# Altium PCB RockRTK.PcbDoc (part 7 of 8)
Units mm, origin at the board's own origin, x right, y up, seen from the top; angles counter-clockwise.
Board outline 128 x 72 mm, 6 copper layers (Top Layer, MidLayer1GND, MidLayer2SIG, MidLayer3PWR, MidLayer4GND, Bottom Layer), stack 1.538 mm thick; 400 components, 307 nets, 1795 pads, 1243 vias.
Unrouted connection lines stored in the file: 522.
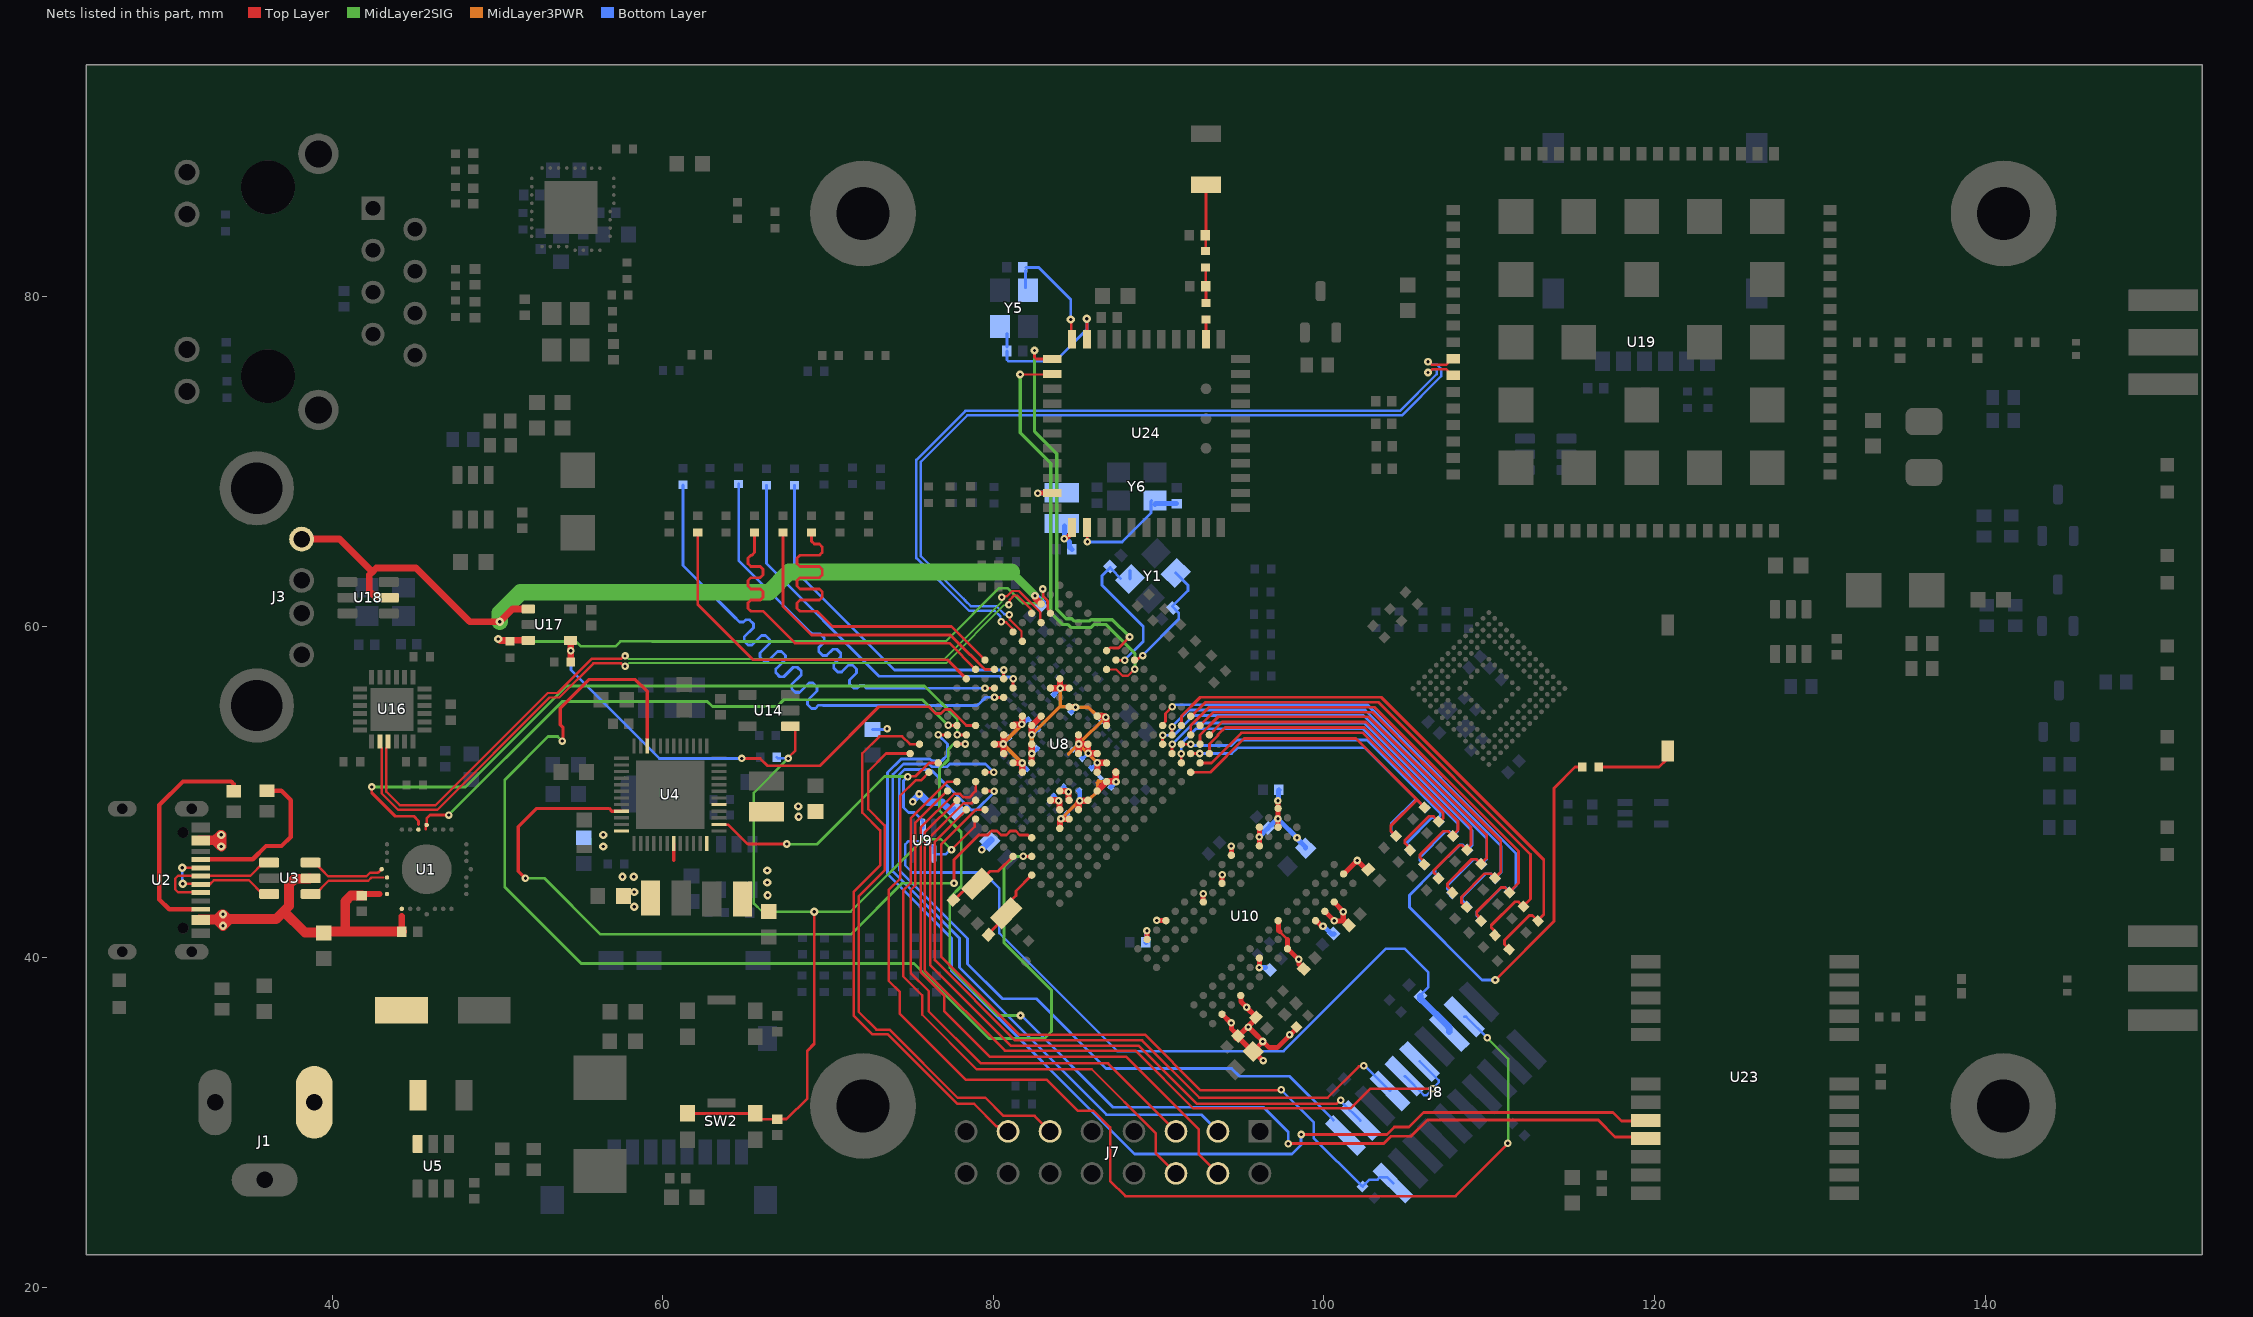
[diagram p10: the nets of this part, all layers, seen from the top]

## Via types
v1: diameter 0.5, hole 0.2, Top Layer to Bottom Layer, tented both sides, 532 vias
v2: diameter 0.457, hole 0.203, Top Layer to Bottom Layer, tented both sides, 414 vias
v3: diameter 0.5, hole 0.2, Top Layer to Bottom Layer, 233 vias
v4: diameter 0.7, hole 0.3, Top Layer to Bottom Layer, 32 vias
v5: diameter 0.457, hole 0.2, Top Layer to Bottom Layer, tented both sides, 30 vias
v6: diameter 0.7, hole 0.3, Top Layer to Bottom Layer, tented both sides, 2 vias

## Nets (pads, with @x,y where several pads share a name; then routed paths per layer and width w, separated by ;. In a path a pad name is that pad's centre, name@x,y a point inside that pad or via, vN(x,y) a via of type N, cw(c..) or ccw(c..) an arc to the next point about the centre after c; other vN are vias at no path point) (continued)
SOC_MII_RXER: R158.2 U8.J15 | length 37.3
  Top Layer w0.169: v2@80.08,55.72 U8.J15@80.646,55.72
  Bottom Layer w0.169: R158.2@61.225,68.575 61.225,63.7 64.27,60.655 64.649,60.276 64.888,60.276 65.024,60.412 65.264,60.412 65.503,60.172 65.503,59.933 64.933,59.362 64.933,59.123 65.172,58.883 65.412,58.883 65.987,59.459 66.227,59.459 66.466,59.22 66.466,58.98 65.89,58.404 65.89,58.165 66.13,57.926 66.369,57.926 66.945,58.501 67.185,58.501 67.424,58.262 67.424,58.023 66.848,57.447 66.848,57.207 67.088,56.968 67.327,56.968 67.903,57.544 68.143,57.544 68.382,57.304 68.382,57.065 67.806,56.489 67.806,56.249 68.046,56.01 68.285,56.01 68.861,56.586 69.1,56.586 69.34,56.346 69.34,56.107 68.764,55.531 68.764,55.292 69.003,55.052 69.243,55.052 69.438,55.247 69.678,55.247 69.7,55.225 69.775,55.225 79.025,55.225 79.085,55.285 79.107,55.285 79.548,55.725 v2(80.075,55.725)
SOC_MII_TXCLK: R152.2 U8.K18 | length 24.3
  Top Layer w0.169: R152.2@69.007,65.7 69.007,65.347 69.007,65.163 69.177,64.994 69.482,64.994 69.652,64.824 69.652,64.486 69.482,64.316 68.305,64.316 68.136,64.147 68.136,63.809 68.305,63.639 69.482,63.639 69.652,63.47 69.652,63.131 69.482,62.962 68.305,62.962 68.136,62.793 68.136,62.454 68.305,62.285 69.482,62.285 69.652,62.115 69.652,61.777 69.482,61.607 68.305,61.607 68.136,61.438 68.136,61.099 68.305,60.93 69.345,60.93 69.43,60.845 70.275,60 77.479,60 U8.K18@79.501,57.978
SOC_MII_TXD0: R148.2 U8.K17 | length 18.8
  Top Layer w0.169: R148.2@67.286,65.7 67.286,64.65 67.286,61.863 67.286,61.214 69,59.5 77.4,59.5 78.6,58.3 78.615,58.3 79.503,57.412 U8.K17@80.066,57.412
SOC_MII_TXD1: R149.2 U8.K16 | length 20.8
  Top Layer w0.169: v2(80.625,57.375) 80.628,57.372 80.628,56.85 U8.K16@80.632,56.847
  Bottom Layer w0.169: R149.2@67.975,68.55 67.975,63.425 74.025,57.375 v2(80.625,57.375)
SOC_MII_TXD2: R150.2 U8.K15 | length 23.1
  Top Layer w0.169: U8.K15@81.2,56.259 81.199,56.26 81.199,56.849 v2(81.2,56.85)
  Bottom Layer w0.169: R150.2@66.275,68.55 66.275,63.825 73.1,57 80.377,57 80.443,56.935 80.807,56.935 80.817,56.944 81.028,56.944 81.122,56.85 v2(81.2,56.85)
SOC_MII_TXD3: R151.2 U8.J18 | length 22.9
  Top Layer w0.169: R151.2@65.564,65.7 65.564,65.036 65.564,64.486 65.395,64.317 65.335,64.317 65.166,64.148 65.166,63.809 65.335,63.64 65.905,63.64 66.074,63.47 66.074,63.132 65.905,62.962 65.335,62.962 65.166,62.793 65.166,62.454 65.335,62.285 65.905,62.285 66.074,62.116 66.074,61.777 65.905,61.608 65.335,61.608 65.166,61.438 65.166,61.1 65.335,60.93 66.07,60.93 66.154,60.846 68,59 77.347,59 U8.J18@78.935,57.412
SOC_MII_TXEN: R153.2 U8.J16 | length 27.3
  Top Layer w0.169: v2@79.505,56.27 U8.J16@80.071,56.27
  Bottom Layer w0.169: R153.2@64.6,68.625 64.6,64 68.799,59.801 69.055,59.545 69.294,59.545 69.534,59.545 69.773,59.306 69.773,59.066 69.444,58.738 69.444,58.498 69.684,58.259 69.923,58.259 70.297,58.632 70.536,58.632 70.776,58.393 70.776,58.153 70.352,57.729 70.352,57.49 70.591,57.251 70.831,57.251 71.255,57.675 71.494,57.675 71.734,57.435 71.734,57.196 71.31,56.772 71.31,56.532 71.549,56.293 71.789,56.293 71.928,56.432 72.168,56.432 72.228,56.372 72.325,56.275 v2(79.5,56.275)
SOC_PMIC_PWR_EN: U4.9 U8.C6 | length 45.9
  Top Layer w0.169: v2(77.625,44.475) 77.625,45.9 79.122,47.397 79.666,47.397 79.897,47.629 80.234,47.629 80.466,47.397 80.799,47.397 81.03,47.629 81.367,47.629 81.598,47.397 81.928,47.397 81.931,47.4 82.089,47.4 82.259,47.23 U8.C6@82.329,47.23
  Top Layer w0.203: v2(51.7,44.775) 51.275,45.2 51.275,47.9 52.375,49 56.759,49 56.925,48.834 U4.9@57.52,48.834
  MidLayer2SIG w0.169: v2(51.7,44.775) 52.85,44.775 56.24,41.385 71.385,41.385 74.475,44.475 v2(77.625,44.475)
SOC_PWR_ONRSTN: U4.26 U8.B15 U9.2 | length 19.7
  Top Layer w0.169: U4.26@63.42,48.034 63.435,48.019 63.956,48.019 65.125,46.85 v2(67.5,46.85) ; v2@74.925,50.95 75.3,50.95 76.106,51.756 U8.B15@76.672,51.756
  MidLayer2SIG w0.169: v2(67.5,46.85) 67.515,46.835 69.335,46.835 73.425,50.925 v2@74.9,50.925
  Bottom Layer w0.169: v2@74.85,50.95 74.575,50.675 74.575,49.05 74.875,48.75 75.234,48.75 75.75,48.234 U9.2@75.75,47.82
  other v2: 74.825,50.925
SOC_RMII_REFCLK: R159.2 U8.H18 | length 22.5
  Top Layer w0.169: R159.2@62.121,65.7 62.121,61.329 65.45,58 70.95,58 71.025,58 75.972,58 76.688,58 77.216,58 U8.H18@78.369,56.847
SOC_RTC_PWRONRSTN: U4.46 U8.B5 | length 73
  Top Layer w0.169: v2@81.826,46.099 U8.B5@82.329,46.099
  Top Layer w0.203: v5(53.925,53.075) 53.974,53.124 53.974,53.599 53.975,53.6 53.975,53.884 53.8,54.059 53.8,55.075 55.525,56.8 58.35,56.8 59.07,56.08 U4.46@59.07,52.784
  MidLayer2SIG w0.169: v5(53.925,53.075) 53.65,53.35 53.075,53.35 50.45,50.725 50.45,44.25 55.075,39.625 75.2,39.625 79.75,35.075 83.1,35.075 83.525,35.5 83.525,38 80.65,40.875 80.65,45.45 81.3,46.1 v2(81.825,46.1)
SOC_RTC_XTALIN: C89.2 U8.A6 Y2.1 | length 4
  Top Layer w0.169: C89.2@77.675,43.5 78.614,44.439 Y2.1@79.018,44.439 ; Y2.1@79.425,44.825 79.8,45.2 80.299,45.2 U8.A6@81.198,46.099
SOC_RTC_XTALOUT: C88.2 U8.A4 Y2.2 | length 4.6
  Top Layer w0.169: C88.2@79.725,41.425 80.786,42.486 80.786,43.136 81.375,43.725 81.375,44.013 U8.A4@82.329,44.967
SOC_SPI1_CS0: J7.04 U8.C12 | length 38.4
  Top Layer w0.152: U8.C12@78.935,50.624 78.935,50.045 78.559,49.668 78.208,49.668 77.993,49.883 77.642,49.883 75.609,47.85 75.609,39.1 77.047,37.662 77.047,36.728 79.8,33.975 88.05,33.975 92.425,29.6 92.425,28.095 J7.04@93.595,26.925 ; J7.04@93.6,26.725 J7.04@93.6,26.92
SOC_SPI1_D0: J7.06 U8.B13 | length 36.3
  Top Layer w0.152: U8.B13@77.804,50.624 77.224,50.624 75,48.4 75,44.475 74.55,44.025 74.55,38.85 75.703,37.697 75.703,36.522 79,33.225 85.957,33.225 89.845,29.338 89.845,28.135 J7.06@91.055,26.925
SOC_SPI1_D1: J7.03 U8.D12 | length 40.3
  Top Layer w0.169: U8.D12@79.495,51.17 79.52,51.195 80.02,51.195 v2(80.025,51.2)
  Bottom Layer w0.169: v2(80.025,51.2) 79.535,51.69 77.365,51.69 77.2,51.525 76.285,51.525 76.12,51.69 74.565,51.69 73.925,51.05 73.925,45.175 77.95,41.15 77.95,39.375 86.85,30.475 92.585,30.475 J7.03@93.595,29.465
SOC_SPI1_SCLK: J7.05 U8.A13 | length 32.7
  Top Layer w0.152: U8.A13@77.238,50.059 77.209,50.059 75.275,48.125 75.275,44.325 75,44.05 75,39.05 76.097,37.953 76.097,36.728 79.25,33.575 86.945,33.575 90.875,29.645 J7.05@90.875,29.425
SOC_SYS_RESET: C90.1 C164.1 J8.15 R14.1 SW2.1 SW2.2 U8.A10 U9.4 U14.1 | length 100
  Top Layer w0.152: v2(67.6,52.025) 67.6,52.082 68.025,52.507 68.025,53.751 67.801,53.975 U14.1@67.725,53.975 ; v2(77.475,46.5) 78.883,47.908 78.883,48.31 U8.A10@78.935,48.362
  Top Layer w0.169: SW2.1@61.575,30.55 SW2.2@65.6,30.55 65.95,30.2 C90.1@66.85,30.2 ; C90.1@66.925,30.205 67.501,30.205 68.753,31.458 68.753,34.343 69.175,34.765 v1(69.175,42.75)
  MidLayer2SIG w0.152: v2@67.55,51.925 67.5,51.925 65.525,49.95 65.525,43.25 66.025,42.75 71.375,42.75 75.775,47.15 76.825,47.15 v2(77.475,46.5)
  Bottom Layer w0.152: R14.1@66.9,52.1 66.975,52.025 v2(67.6,52.025) ; U9.4@76.4,46.28 76.4,46.644 76.315,46.729 76.204,46.729 75.906,47.027 74.877,47.027 74.675,46.825 74.675,45.55 75.1,45.125 79.4,45.125 80.375,44.15 80.375,41.45 87.5,34.325 97.561,34.325 103.736,40.5 104.9,40.5 106.325,39.075 106.325,38.2 C164.1@105.85,37.725 ; U9.4@76.45,46.225 77.118,46.225 77.393,46.5 v2(77.475,46.5) ; J8.15@106.752,36.523 107.479,35.641 J8.15@107.595,35.501
  Bottom Layer w0.406: C164.1@105.839,37.636 105.829,37.625 105.829,37.503 107.595,35.737 J8.15@107.595,35.501
SOC_TCK: J8.09 J8.11 U8.A12 | length 50.4
  Top Layer w0.152: U8.A12@77.804,49.493 75.85,47.539 75.85,39.2 80.7,34.35 88.6,34.35 92.1,30.85 101.625,30.85 102.825,32.05 v2(106.575,32.05)
  Bottom Layer w0.152: J8.09@104.901,32.807 106.058,31.65 106.221,31.65 106.575,32.004 v2(106.575,32.05) 106.95,32.425 106.95,32.554 J8.11@105.799,33.705
SOC_TDI: J8.03 U8.B11 | length 41.4
  Top Layer w0.152: U8.B11@78.935,49.493 78.865,49.493 78.697,49.325 78.215,49.325 76.175,47.285 76.175,39.525 81.05,34.65 88.8,34.65 92.3,31.15 100.783,31.15 100.983,31.35 v2(101.025,31.35)
  Bottom Layer w0.152: v2@101.096,31.224 J8.03@102.207,30.113
SOC_TDO: J8.07 U8.A11 | length 42.2
  Top Layer w0.152: U8.A11@78.369,48.927 78.369,48.894 76.475,47 76.475,39.825 81.325,34.975 89,34.975 92.475,31.5 100.225,31.5 102.117,33.392 102.392,33.392 v2(102.425,33.425)
  Bottom Layer w0.152: v2@102.525,33.35 102.531,33.356 102.555,33.356 J8.07@104.003,31.909
SOC_TMS: J8.01 U8.C11 | length 47.1
  Top Layer w0.169: U8.C11@79.505,50.055 v2@80.045,50.055
  Bottom Layer w0.169: v2(80.05,50.05) 80.05,49.975 78.975,48.9 78.675,48.9 76.308,51.267 76.178,51.267 76.079,51.365 74.643,51.365 74.325,51.048 74.325,50.79 74.317,50.782 74.317,48.943 74.325,48.935 74.325,45.25 78.45,41.125 78.45,39.6 80.56,37.49 81.307,37.49 82.61,37.49 86.825,33.275 94.425,33.275 94.9,32.8 97.925,32.8 J8.01@100.575,30.15
SOC_TRSTN: J8.02 R168.2 U8.B10 | length 44.3
  Top Layer w0.152: U8.B10@79.501,48.927 78.949,48.927 76.85,46.828 76.85,40.05 81.6,35.3 89.2,35.3 92.55,31.95 97.4,31.95 v2(97.425,31.975)
  Bottom Layer w0.152: v2(97.425,31.975) 99.375,30.025 99.375,29.075 R168.2@102.271,26.179 ; R168.2@102.346,26.129 102.768,26.55 103.253,26.55 103.406,26.702 103.821,26.702 J8.02@104.187,26.337
SOC_UART1_RX: U8.D16 U23.20 | length 67.8
  Top Layer w0.169: v2(76.675,53.45) 76.676,53.451 77.189,53.451 U8.D16@77.195,53.445 ; v2(98.625,29.275) 103.812,29.275 104.264,29.726 105.151,29.726 106.025,30.6 117.5,30.6 118,30.1 119.35,30.1 U23.20@119.375,30.125
  Bottom Layer w0.169: v2(76.675,53.45) 77.225,52.9 77.225,52.225 76.885,51.885 76.29,51.885 76.175,52 74.435,52 73.6,51.165 73.6,45.025 77.475,41.15 77.475,39.179 88.554,28.1 98.075,28.1 98.625,28.65 v2(98.625,29.275)
SOC_UART1_TX: U8.D15 U23.21 | length 63.8
  Top Layer w0.169: U8.D15@77.755,52.905 v2@78.295,52.905 ; v2(97.85,28.725) 103.627,28.725 104.069,29.167 105.281,29.167 106.264,30.15 116.6,30.15 117.625,29.125 119.125,29.125 U23.21@119.3,28.95
  MidLayer2SIG w0.169: v2(78.3,52.9) 77.6,52.9 77.275,52.575 77.275,51.95 76.75,51.425 76.75,48.875 78.065,47.56 78.065,44.293 77.375,43.602 77.375,39.375 80.275,36.475 v2(81.65,36.475)
  Bottom Layer w0.169: v2(81.65,36.475) 81.7,36.475 87.25,30.925 96.35,30.925 97.85,29.425 v2(97.85,28.725)
SOC_UART2_RX: J7.11 U8.A17 | length 33.2
  Top Layer w0.152: U8.A17@74.975,52.321 74.971,52.325 73.525,52.325 72.45,51.25 72.45,48.95 73.425,47.975 73.425,45.25 71.85,43.675 71.85,36.7 72.925,35.625 73.725,35.625 77.85,31.5 79.525,31.5 80.625,30.4 82.5,30.4 J7.11@83.435,29.465
SOC_UART2_TX: J7.13 U8.B17 | length 33.3
  Top Layer w0.152: U8.B17@75.541,52.887 74.961,52.887 74.486,53.362 73.112,53.362 72.075,52.325 72.075,48.75 73.15,47.675 73.15,45.55 71.55,43.95 71.55,37.466 71.553,37.463 71.553,37.087 71.55,37.084 71.55,36.475 72.675,35.35 73.6,35.35 77.825,31.125 78.85,31.125 80.209,29.766 80.264,29.766 80.566,29.465 J7.13@80.895,29.465
SOC_XDMA_INTR0: J8.17 U8.A15 | length 69.6
  Top Layer w0.152: U8.A15@76.106,51.19 75.617,50.7 75.3,50.7 74.375,49.775 74.375,44.775 73.675,44.075 73.675,38.575 74.353,37.897 74.353,36.572 78.35,32.575 83.25,32.575 85.1,30.725 86.05,30.725 87.075,29.7 87.075,26.475 88,25.55 107.975,25.55 v2@111.174,28.749
  MidLayer2SIG w0.152: v2@109.9,35.1 111.157,33.843 111.157,28.769 v2(111.132,28.744)
  Bottom Layer w0.152: J8.17@108.493,36.399 108.601,36.399 109.925,35.075 v2@109.925,35.05
  other v2: 109.875,35.125
SOC_XTALIN: C86.2 U8.V10 Y1.1 | length 7.2
  Top Layer w0.169: U8.V10@88.708,58.034 88.756,58.034 88.972,58.25 v2(89.05,58.25)
  Bottom Layer w0.169: v2(89.05,58.25) 89.05,58.275 91.225,60.45 91.225,60.829 90.838,61.216 90.838,61.238 91.775,62.175 91.775,62.501 Y1.1@91.039,63.237
SOC_XTALOUT: C87.2 U8.U11 Y1.3 | length 9
  Top Layer w0.169: U8.U11@87.542,57.968 v2@87.943,57.968
  Bottom Layer w0.169: C87.2@87.075,63.575 86.575,63.075 86.575,62.5 89.075,60 89.075,59.1 v2(87.95,57.975) ; C87.2@87.175,63.45 Y1.3@87.706,62.919 ; Y1.3@88.281,62.883 Y1.3@88.281,63.394
SYS_BOOT0: R31.1 R48.2 U8.R1 | length 19.7
  Top Layer w0.169: U8.R1@91.946,51.19 93.14,51.19 95.175,53.225 101.95,53.225 R48.2@106.161,49.014 ; R31.1@104.358,47.33 104.05,47.639 104.05,47.95 105.6,49.5
SYS_BOOT1: R30.1 R47.2 U8.R2 | length 24.9
  Top Layer w0.169: U8.R2@91.37,51.729 v2@91.37,52.295
  Bottom Layer w0.169: v2(91.375,52.3) 91.375,52.923 92.277,53.825 102.375,53.825 108.1,48.1 108.1,47.625 R47.2@107.825,47.35 ; R30.1@106.05,45.625 105.8,45.875 105.8,46.025 107.4,47.625 107.575,47.625 107.804,47.396 R47.2@107.804,47.329
SYS_BOOT2: R29.1 R32.1 R46.2 U8.R3 | length 51.8
  Top Layer w0.169: U8.R3@90.82,52.304 v2@90.82,52.87 ; v1(110.375,38.625) 113.925,42.175 113.925,50.225 115.2,51.5 R32.1@115.625,51.5
  Bottom Layer w0.169: v2(90.825,52.875) 92.125,54.175 102.425,54.175 108.975,47.625 108.975,46.8 R46.2@108.679,46.504 108.679,46.521 108.4,46.8 108.225,46.8 106.725,45.3 ; R29.1@106.875,44.7 106.875,44.9 106.725,45.05 106.725,45.3 ; v1(110.375,38.625) 109.575,38.625 105.175,43.025 105.175,43.75 106.725,45.3
SYS_BOOT2_BTN: R32.2 SW3.1 | length 5.2
  Top Layer w0.169: R32.2@116.625,51.5 120.275,51.5 120.75,51.975 120.75,52.7 SW3.1@120.85,52.8
SYS_BOOT3: R28.1 R45.2 U8.R4 | length 28.9
  Top Layer w0.169: U8.R4@90.245,52.854 v2@90.245,53.42
  Bottom Layer w0.169: v2(90.25,53.425) 90.925,53.425 92.125,54.625 102.4,54.625 109.85,47.175 109.85,45.95 R45.2@109.525,45.625 ; R28.1@107.7,43.85 107.7,43.9 107.475,44.125 107.475,44.35 109.05,45.925 109.225,45.925 109.521,45.629 R45.2@109.529,45.629
SYS_BOOT4: R27.1 R44.2 U8.T1 | length 21.5
  Top Layer w0.169: U8.T1@92.511,51.756 93.206,51.756 95.025,53.575 102.375,53.575 107.225,48.725 107.225,48.425 107.05,48.25 R44.2@106.975,48.25 ; R27.1@105.1,46.55 105.137,46.587 105.137,46.663 104.9,46.9 104.9,47.075 106.349,48.524 106.625,48.524 R44.2@106.939,48.21
SYS_BOOT5: R26.1 R43.2 U8.T2 | length 18.8
  Top Layer w0.169: U8.T2@91.929,52.33 v2@92.495,52.33
  Bottom Layer w0.169: v2(92.5,52.325) 94.425,52.325 94.775,52.675 102.482,52.675 106.007,49.15 R43.2@106.15,49.15 ; R26.1@104.354,47.329 104.321,47.329 104.075,47.575 104.075,48.075 105.575,49.575
SYS_BOOT6: R25.1 R42.2 U8.T3 | length 21.4
  Top Layer w0.169: U8.T3@91.379,52.88 v2@91.945,52.88
  Bottom Layer w0.169: v2(91.95,52.875) 92.005,52.82 92.188,52.82 92.193,52.814 94.414,52.814 94.75,53.15 102.606,53.15 107.048,48.708 107.048,48.568 106.936,48.455 106.936,48.221 R42.2@106.954,48.204 ; R25.1@105.204,46.479 105.204,46.646 105.045,46.805 105.045,46.945 106.55,48.45 106.625,48.45 106.85,48.225 R42.2@106.975,48.225
SYS_BOOT7: R24.1 R41.2 U8.T4 | length 29.7
  Top Layer w0.169: v2(90.825,53.95) 90.82,53.945 90.82,53.479 U8.T4@90.832,53.466
  Bottom Layer w0.169: v2(90.825,53.95) 91.825,54.95 102.5,54.95 110.725,46.725 110.725,45.125 R41.2@110.35,44.75 ; R24.1@108.525,43.1 108.567,43.142 108.567,43.233 108.35,43.45 108.35,43.625 109.775,45.05 110.1,45.05 110.354,44.796 R41.2@110.354,44.779
SYS_BOOT8: R23.1 R40.2 U8.U1 | length 22.6
  Top Layer w0.169: U8.U1@93.077,52.321 93.077,52.889 93.603,53.415 93.603,53.467 94.036,53.9 102.45,53.9 108.125,48.225 108.125,47.7 R40.2@107.875,47.45 ; R23.1@106.025,45.65 106.025,45.825 105.825,46.025 105.825,46.2 107.25,47.625 107.5,47.625 107.782,47.343 R40.2@107.805,47.343
SYS_BOOT9: R22.1 R39.2 U8.U2 | length 26.5
  Top Layer w0.169: U8.U2@92.511,52.887 92.511,53.451 93.611,54.55 102.7,54.55 109.85,47.4 109.85,46 R39.2@109.55,45.7 ; R22.1@107.75,43.975 107.75,44 107.475,44.275 107.475,44.45 108.95,45.925 109.225,45.925 109.52,45.63 R39.2@109.52,45.629
SYS_BOOT10: R21.1 R38.2 U8.U3 | length 30.4
  Top Layer w0.169: U8.U3@91.946,53.453 91.946,54.016 93.054,55.125 103.075,55.125 111.775,46.425 111.775,44.5 111.375,44.1 R38.2@111.375,44.025 ; R21.1@109.4,42.175 109.434,42.209 109.434,42.391 109.25,42.575 109.25,42.75 110.725,44.225 110.95,44.225 111.23,43.945 R38.2@111.23,43.918
SYS_BOOT11: R20.1 R37.2 U8.U4 | length 34
  Top Layer w0.169: U8.U4@91.38,54.018 91.38,54.582 92.523,55.725 103.475,55.725 113.3,45.9 113.3,42.575 R37.2@113,42.275 ; R20.1@111.075,40.625 110.925,40.775 110.925,41.025 112.425,42.525 112.625,42.525 R37.2@112.944,42.204 R37.2@112.944,42.204
SYS_BOOT12: R19.1 R36.2 U8.V2 | length 23.6
  Top Layer w0.169: U8.V2@93.077,53.453 93.849,54.225 102.55,54.225 108.9,47.875 108.9,46.825 108.654,46.579 R36.2@108.654,46.495 108.63,46.495 108.35,46.775 108.175,46.775 106.65,45.25 106.65,45.125 106.9,44.875 R19.1@106.9,44.775
SYS_BOOT13: R18.1 R35.2 U8.V3 | length 27.6
  Top Layer w0.169: U8.V3@92.511,54.018 93.318,54.825 102.925,54.825 105.947,51.803 ; 105.925,51.825 110.7,47.05 110.7,45.147 R35.2@110.351,44.798 110.351,44.824 110.12,45.055 109.73,45.055 108.325,43.65 108.325,43.3 R18.1@108.6,43.025
SYS_BOOT14: R17.1 R34.2 U8.V4 | length 31.5
  Top Layer w0.169: U8.V4@91.946,54.584 91.991,54.584 92.832,55.425 103.3,55.425 112.5,46.225 112.5,43.525 112.087,43.112 R34.2@112.087,43.061 112.057,43.061 111.768,43.35 111.55,43.35 110.131,41.931 110.131,41.791 110.339,41.583 110.339,41.539 R17.1@110.15,41.35
SYS_BOOT15: R16.1 R33.2 U8.T5 | length 31.6
  Top Layer w0.169: U8.T5@90.249,54.018 90.249,54.091 90.416,54.258 90.416,54.749 90.817,55.15 v2(90.825,55.15)
  Bottom Layer w0.169: v2(90.825,55.15) 90.903,55.15 91.028,55.275 102.625,55.275 111.625,46.275 111.625,44.325 R33.2@111.229,43.929 111.229,43.971 110.975,44.225 110.75,44.225 109.25,42.725 109.25,42.525 R16.1@109.4,42.375
TYPEC_CC1: R2.2 U2.A5 | length 9.6
  Top Layer w0.254: U2.A5@32.325,45.925 35.204,45.925 36.004,46.725 36.95,46.725 37.5,47.275 37.5,49.5 36.925,50.075 R2.2@36.075,50.075
TYPEC_CC2: R1.2 U2.B5 | length 13.5
  Top Layer w0.254: U2.B5@31.55,42.9 30.149,42.9 29.55,43.499 29.55,49.2 30.975,50.625 33.901,50.625 34.05,50.476 R1.2@34.05,50.05
TYPEC_USB_N: U2.A7 U2.B7 U3.3 | length 8.8
  Top Layer w0.146: v1(30.937,45.415) 30.943,45.421 31.978,45.421 31.984,45.427 U2.B7@32.404,45.427 ; v1(30.963,44.45) 30.974,44.438 31.972,44.438 U2.A7@31.984,44.427 ; U3.3@35.919,44.022 36.141,43.8 35.831,43.8 34.977,44.654 32.854,44.654 32.627,44.427 U2.A7@32.404,44.427 ; U2.A7@31.984,44.427 U2.A7@32.404,44.427 ; U2.A7@31.984,44.427 U2.A7@32.404,44.427
  Bottom Layer w0.146: v1(30.937,45.415) 30.95,45.402 30.95,44.463 v1(30.963,44.45)
TYPEC_USB_P: U2.A6 U2.B6 U3.1 | length 8.6
  Top Layer w0.146: U2.B6@32.404,43.927 31.984,43.927 30.687,43.927 30.513,44.101 30.513,44.753 30.687,44.927 31.984,44.927 32.404,44.927 35.058,44.927 U3.1@35.831,45.7 ; U3.1@35.87,45.7 U3.1@36.141,45.7
UART0_RX: U1.26 U8.E15 | length 44.4
  Top Layer w0.169: v2@42.4,50.285 42.4,49.95 43.825,48.525 44.95,48.525 45.225,48.25 45.225,48.025 ; v2@77.83,53.445 U8.E15@78.37,53.445
  MidLayer2SIG w0.169: v2(42.4,50.3) 48.075,50.3 54.175,56.4 75.85,56.4 77.825,54.425 v2(77.825,53.45)
UART0_TX: U1.25 U8.E16 | length 36.7
  Top Layer w0.169: 45.675,47.75 U1.25@45.675,48.045 ; U1.25@45.725,48 45.725,48.4 45.925,48.6 v2(47.05,48.6) ; v2@77.28,54.02 U8.E16@77.82,54.02
  MidLayer2SIG w0.169: v2(47.05,48.6) 53.925,55.475 62.7,55.475 63.015,55.16 66.91,55.16 67.325,55.575 75.725,55.575 v2(77.275,54.025)
USB0_N: U8.N18 U19.28 | length 50.2
  Top Layer w0.146: v2(80.475,60.3) 80.511,60.264 80.78,60.264 81.139,59.905 81.139,59.733 U8.N18@81.198,59.675 ; v2(106.3,75.375) 106.353,75.375 106.541,75.563 106.858,75.563 106.863,75.568 107.412,75.568 107.498,75.483 107.498,75.432 107.725,75.205 U19.28@107.825,75.205
  Bottom Layer w0.146: v2(80.475,60.3) 80.439,60.336 80.439,60.605 80.082,60.962 78.538,60.962 75.352,64.148 75.352,70.088 78.312,73.048 104.606,73.048 106.83,75.272 106.83,75.478 106.745,75.563 106.541,75.563 106.353,75.375 v2(106.3,75.375)
USB0_P: U8.N17 U19.27 | length 51.3
  Top Layer w0.146: v2(80.975,60.725) 81.011,60.689 81.011,60.42 81.71,59.721 81.71,59.163 U8.N17@81.763,59.11 ; v2(106.3,76.025) 106.353,76.025 106.541,75.837 106.745,75.837 106.75,75.842 107.412,75.842 107.498,75.927 107.498,75.978 107.725,76.205 U19.27@107.825,76.205
  Bottom Layer w0.146: v2(80.975,60.725) 80.939,60.761 80.67,60.761 80.195,61.235 78.651,61.235 78.298,61.588 78.204,61.682 75.625,64.261 75.625,69.975 78.425,72.775 104.72,72.775 107.104,75.159 107.104,75.591 106.858,75.837 106.541,75.837 106.353,76.025 v2(106.3,76.025)
USB1_DRVVBUS: R92.1 U8.F15 U17.4 | length 31.5
  Top Layer w0.169: v2(64.775,52.025) 65.9,52.025 66.34,51.585 69.51,51.585 73.075,55.15 76.104,55.15 76.503,54.751 76.841,54.751 77.073,54.983 77.407,54.983 77.65,54.74 ; 77.65,54.75 77.65,54.74 ; U8.F15@78.935,54.018 78.371,54.018 77.65,54.74
  Top Layer w0.406: U17.4@54.422,59.17 54.435,59.157 54.435,57.882 R92.1@54.447,57.87
  Bottom Layer w0.169: v2@54.45,58.575 54.45,57.375 59.8,52.025 v2(64.775,52.025)
  other v2: 54.45,58.55
USB1_N: U8.R18 U16.14 | length 49.1
  Top Layer w0.146: U16.14@42.89,53.038 42.89,52.763 43.004,52.649 43.004,49.91 43.989,48.925 46.373,48.925 53.161,55.713 53.749,55.713 55.813,57.777 57.484,57.777 57.661,57.6 v5(57.725,57.6) ; v5(80.95,61.325) 80.995,61.37 80.995,61.62 81.259,61.884 81.449,61.884 82.271,61.063 82.271,60.865 U8.R18@82.329,60.807
  MidLayer2SIG w0.113: v5(57.725,57.6) 57.77,57.6 57.963,57.794 77.145,57.794 80.645,61.293 80.918,61.293 v5(80.95,61.325)
USB1_OCN: R94.2 U8.T17 U17.3 | length 39.2
  Top Layer w0.152: v2(83,62.275) 83.029,62.246 83.029,61.818 83.275,61.572 83.275,61.544 83.285,61.534 83.285,61.063 83.46,60.887 U8.T17@83.46,60.807
  Top Layer w0.406: v1(50.05,59.25) 50.075,59.25 50.159,59.166 50.725,59.166 R94.2@50.772,59.12 ; R94.2@50.797,59.12 50.847,59.17 U17.3@51.872,59.17
  MidLayer2SIG w0.152: v1(50.05,59.25) 50.144,59.25 50.294,59.1 54.75,59.1 55.05,58.8 57.144,58.8 57.45,59.107 59.379,59.107 59.386,59.1 77.125,59.1 80.35,62.325 80.875,62.325 81.65,61.55 81.786,61.414 82.675,61.414 83,61.739 v2(83,62.275)
USB1_P: U8.R17 U16.15 | length 49.8
  Top Layer w0.146: U16.15@43.39,53.038 43.39,52.763 43.277,52.649 43.277,50.023 44.102,49.198 46.26,49.198 53.048,55.986 53.636,55.986 55.7,58.05 57.484,58.05 57.661,58.227 v5(57.725,58.227) ; v5(80.52,61.782) 80.566,61.827 80.816,61.827 81.146,62.157 81.562,62.157 82.841,60.879 82.841,60.294 U8.R17@82.895,60.241
  MidLayer2SIG w0.113: v5(57.725,58.227) 57.77,58.227 57.963,58.033 77.046,58.033 80.489,61.477 80.489,61.75 v5(80.52,61.782)
USB_CONVR_N: U1.5 U3.4 | length 4.9
  Top Layer w0.146: U3.4@38.651,43.8 38.961,43.8 39.787,44.626 42.193,44.626 42.392,44.825 43.089,44.825
USB_CONVR_P: U1.4 U3.6 | length 4.8
  Top Layer w0.146: U3.6@38.651,45.7 38.961,45.7 39.421,45.24 ; 39.421,45.237 39.421,45.24 ; 42.76,45.114 42.295,45.114 42.08,44.899 39.762,44.899 39.421,45.24 ; 42.806,45.131 U1.4@43,45.325
VBUS_IN: C1.1 C2.1 C3.1 C7.1 U1.7 U1.8 U2.A4/B9 U2.B4/A9 U3.5 U4.12 | length 25.8
  Top Layer w0.381: C3.1@41.8,43.73 41.895,43.825 42.85,43.825 ; C2.1@44.22,41.55 44.22,42.475
  Top Layer w0.6: U2.B4/A9@31.984,42.277 33.023,42.277 ; U2.A4/B9@31.984,47.077 32.923,47.077 ; U3.5@38.651,44.75 38.646,44.745 37.746,44.745 37.4,44.399 37.4,43.1 37.076,42.776 ; 40.8,41.626 40.8,43.379 41.151,43.73 C3.1@41.8,43.73 ; C2.1@44.22,41.55 40.8,41.55 39.575,41.55 C1.1@39.5,41.475 39.336,41.475 39.325,41.486 38.366,41.486 37.076,42.776 ; 32.923,47.077 33.246,47.4 v1(33.3,47.4) v1(33.3,46.7) 32.923,47.077 ; 33.023,42.277 33.346,42.6 v1(33.4,42.6) ; 33.023,42.277 v1(33.4,41.9) ; v1(33.4,41.9) 33.7,42.2 33.7,42.3 ; v1(33.4,41.9) v1(33.4,42.6) ; v1(33.4,42.6) 33.7,42.3 ; 33.7,42.3 36.6,42.3 37.076,42.776
  other v1: 56.4,46.7 56.4,47.4
VBUS_OUT: C162.1 J3.1 U8.T18 U17.1 U18.5 | length 54.7
  Top Layer w0.406: J3.1@38.1,65.3 40.45,65.3 42.437,63.312 ; U18.5@43.435,61.75 43.343,61.842 42.558,61.842 42.25,62.15 42.25,63.125 42.437,63.312 ; v1(50.15,60.3) 48.325,60.3 45.075,63.55 42.675,63.55 42.437,63.312 ; v1@50.168,60.318 50.92,61.07 U17.1@51.872,61.07 ; v2(82.525,61.875) 82.535,61.865 82.535,61.744 82.895,61.384 U8.T18@82.895,61.372
  MidLayer2SIG w0.508: 81.1,63.3 v2@82.515,61.885
  MidLayer2SIG w1.016: v1(50.15,60.3) 50.15,60.83 51.395,62.075 66.426,62.075 67.651,63.3 81.1,63.3
  Bottom Layer w0.406: v2(82.525,61.875) 82.539,61.875 82.939,61.475 C162.1@82.975,61.475
VCCIN: C4.1 C25.1 J1.1 U5.3
VDD_1V1_CORE: C20.1 C51.1 C52.1 C53.1 C54.1 C55.1 C56.1 C57.1 C58.1 C59.1 C60.1 C61.1 L3.2 U4.29 U8.F6 U8.F7 U8.G6 U8.G7 U8.G10 U8.H11 U8.J12 U8.K6 U8.K8 U8.K12 U8.L6 U8.L7 U8.L8 U8.L9 U8.M11 U8.M13 U8.N8 U8.N9 U8.N12 U8.N13 | length 29.4
  Top Layer w0.254: U8.H11@82.325,52.875 U8.H11@82.327,52.873
  Top Layer w0.305: U8.N13@84.025,56.825 U8.N13@84.038,56.812
  Top Layer w0.381: U8.G10@82.316,51.887 v2@82.316,52.316 ; v2(82.325,53.45) 82.325,54.014 U8.K12@82.895,54.584 ; v2@82.327,52.327 U8.H11@82.327,52.873 ; U8.F7@83.492,49.499 83.501,49.49 83.935,49.49 v2(83.95,49.475) 83.95,49.454 84.013,49.392 84.013,48.959 84.041,48.931 U8.F6@84.056,48.931 ; U8.M13@83.575,56.275 v2(84.05,56.275) ; v2@84.038,56.287 U8.N13@84.038,56.812 ; U8.G7@84.045,50.059 84.471,50.059 84.529,50 v2(84.55,50) ; v2@84.079,56.304 U8.N12@84.403,56.304 ; v2@84.55,49.979 84.55,49.553 84.592,49.512 U8.G6@84.592,49.493 ; U8.M11@84.606,55.154 84.623,55.137 84.963,55.137 v2(84.975,55.125) ; U8.K8@85.151,52.342 85.155,52.342 85.166,52.353 85.166,52.891 v2(85.175,52.9) ; U8.L9@85.152,53.448 85.166,53.434 85.166,52.909 v2(85.175,52.9) ; U8.N9@86.294,54.594 86.317,54.571 86.734,54.571 86.779,54.525 v2(86.8,54.525) 86.8,54.504 86.841,54.463 86.841,54.043 U8.N8@86.858,54.026 ; v2(86.297,51.756) U8.L6@86.869,51.756 ; U8.K6@86.301,51.192 v2@86.301,51.752 ; U8.L7@86.308,52.301 86.274,52.335 85.786,52.335 85.771,52.35 v2(85.75,52.35) 85.736,52.364 85.736,52.876 85.712,52.9 v2(85.175,52.9)
  MidLayer3PWR w0.203: v2(82.325,53.45) 84.05,55.175 v2(84.05,56.275) ; 84.05,55.15 84.95,55.15 v2(84.975,55.125) 85.753,55.125 86.186,54.693 86.563,54.693 86.731,54.525 v2(86.8,54.525) 86.8,54.515 85.185,52.9 v2(85.175,52.9) ; 84.55,52.275 85.15,52.875 v2@85.175,52.875 ; v2@85.2,52.864 86.297,51.767 v2(86.297,51.756)
  MidLayer3PWR w0.254: v2(82.325,52.325) v2(82.325,53.45)
  Bottom Layer w0.203: C51.1@72.7,53.775 73.475,53.775 v2@73.5,53.75 ; C52.1@83.634,49.774 83.667,49.807 C52.1@83.7,49.807 ; v2@83.881,49.475 v2(83.95,49.475) ; C53.1@84.224,50.309 84.252,50.309 C53.1@84.302,50.359 ; C53.1@84.234,50.319 C53.1@84.234,50.324 ; v2@84.501,50.049 v2(84.55,50) ; C61.1@84.851,52.576 v2(85.175,52.9) ; C56.1@85.351,52.059 85.387,52.023 85.42,52.023 85.504,52.108 85.746,52.35 v2(85.75,52.35) ; C57.1@85.876,51.484 85.912,51.448 85.945,51.448 86.021,51.525 86.051,51.525 86.282,51.756 v2(86.297,51.756) ; C55.1@86.525,54.25 v2(86.8,54.525)
  Bottom Layer w0.254: v2(82.325,52.325) 82.375,52.325 C60.1@82.675,52.625 ; v2@82.325,52.35 v2@82.325,52.38
  Bottom Layer w0.279: v2@82.425,53.55 82.688,53.813 82.709,53.813 C54.1@82.722,53.8 ; C52.1@83.634,49.774 83.643,49.774 83.916,49.5 v2@84,49.5 ; C59.1@83.651,55.859 83.651,55.868 83.996,56.213 84.037,56.213 v2@84.05,56.2 ; C53.1@84.268,50.299 v2@84.541,50.025 ; C58.1@84.725,54.85 84.975,55.1 v2(84.975,55.125)
  other v1: 68.225,48.5 68.2,49.125
  other v2: 73.575,53.825
VDD_1V1_MPU: C21.1 C40.1 C41.1 C42.1 C43.1 L2.2 U4.24 U8.F10 U8.F11 U8.F12 U8.F13 U8.G13 U8.H13 U8.J13 | length 11.3
  Top Layer w0.254: U8.H13@81.203,54 U8.H13@81.259,54.056 ; U8.F10@81.757,51.197 U8.F10@81.763,51.19
  Top Layer w0.381: U8.F13@80.066,52.887 v2@80.587,52.887 ; U8.F12@80.616,52.337 v2@80.616,52.884 ; v2@80.625,52.925 U8.G13@80.625,53.325 ; U8.F12@80.675,52.278 U8.F12@80.675,52.3 ; U8.F11@81.251,51.75 v2@81.7,51.75 ; U8.H13@81.259,54.056 v2@81.626,54.056 ; v2(81.725,54.1) 81.725,54.121 81.763,54.159 U8.J13@81.763,54.584 ; U8.F10@81.757,51.197 v2@81.757,51.656
  MidLayer3PWR w0.254: v2@81.775,51.675 81.775,51.725 v2(80.6,52.9) 80.6,52.937 81.737,54.075 v2@81.775,54.075
  Bottom Layer w0.254: v2(75.125,49.4) v2@75.125,49.438 ; v2@75.487,49.8 v2@75.525,49.8 ; C40.1@77.361,48.914 77.564,48.914 C40.1@77.65,49 ; v2@80.625,52.925 80.625,52.946 80.958,53.279 80.958,53.282 C42.1@80.949,53.291 ; v2@81.75,54.15 81.761,54.139 81.828,54.139 82.104,54.415 82.107,54.415 C41.1@82.139,54.382 ; v2@81.775,51.65 81.775,51.618 82.024,51.369 C43.1@82.024,51.366
  Bottom Layer w0.406: v2@75.125,49.438 v2@75.487,49.8
  Bottom Layer w0.457: v2(75.525,49.875) 76.025,49.375 76.9,49.375 C40.1@77.361,48.914
  other v1: 66.35,43.75 66.325,44.525 66.325,45.25
  other v2: 81.75,51.75
VDD_1V5_DDR3L: C22.1 C35.1 C36.1 C37.1 C38.1 C39.1 C91.1 C92.1 C93.1 C94.1 C95.1 C96.1 C97.1 C98.1 C99.1 C100.1 C101.1 C102.1 L1.2 R50.2 U4.19 U8.E5 U8.F5 U8.G5 U8.H5 U8.J5 U8.K5 U8.L5 U10.A1 U10.A8 U10.B2 U10.C1 U10.C9 U10.D2 U10.D9 U10.E9 U10.F1 U10.G7 U10.H2 U10.H9 U10.K2 U10.K8 U10.N1 U10.N9 U10.R1 U10.R9 | length 46.4
  Top Layer w0.152: 97.4,41.5 97.4,41.475 97.8,41.075
  Top Layer w0.169: U10.C1@96.102,47.864 U10.C1@96.103,47.866 ; U10.A1@97.23,48.993 U10.A1@97.235,48.998
  Top Layer w0.203: L1.2@59.274,43.575 L1.2@59.375,43.676 ; 60.67,45.861 U4.19@60.67,46.884
  Top Layer w0.305: U8.F5@84.564,48.334 U8.F5@84.592,48.362 ; U10.R1@89.295,41.029 v2@89.295,41.595 ; v2@89.905,42.22 U10.N1@90.471,42.22 ; U10.K2@92.7,43.359 v2(92.7,43.85) ; U10.R9@93.827,36.588 93.827,36.582 94.384,36.025 v2(94.4,36.025) 94.407,36.018 94.407,35.672 94.686,35.393 94.686,35.089 v2@95.411,35.814 ; U10.H2@93.845,44.429 v2@93.845,44.995 ; v2(94.4,46.725) 94.403,46.722 94.403,46.172 U10.F1@94.406,46.169 ; C92.1@94.7,35.175 94.812,35.175 95.689,34.298 95.75,34.298 96.298,33.75 v2(96.325,33.75) ; U10.N9@94.977,37.688 94.977,37.323 v2(95.325,36.975) 95.325,36.962 95.933,36.355 C93.1@95.951,36.355 ; C91.1@95.723,34.298 96.25,34.825 v2@96.25,34.9 ; C93.1@95.936,36.339 v2@95.411,35.814 ; U10.D2@96.095,46.704 v2@96.095,47.27 ; v2@96.095,47.275 U10.C1@96.095,47.804 ; v2@96.105,39.38 U10.K8@96.105,39.946 ; U10.A1@97.22,48.857 v2@97.22,49.43 ; U10.B2@97.225,47.844 v2(97.225,48.375) ; v2@97.23,48.42 U10.A1@97.23,48.993 ; U10.G7@97.235,42.209 97.263,42.182 97.263,41.616 97.334,41.544 ; U10.H9@97.8,40.512 97.8,41.075 ; U10.H9@97.818,40.513 98.456,39.875 v2(98.475,39.875) 98.504,39.846 98.504,39.571 C100.1@98.8,39.275 ; R50.2@98.3,35.65 97.175,34.525 96.7,34.525 v2@95.411,35.814 ; U10.E9@99.502,42.188 99.558,42.188 99.842,41.904 99.921,41.904 v2(99.95,41.875) ; U10.D9@100.077,42.763 100.077,42.754 100.625,42.207 v2(100.625,42.2) 101.275,42.2 101.536,41.939 C97.1@101.536,41.861 ; U10.C9@100.627,43.338 100.627,43.32 v2@101.175,42.772 ; 101.175,42.2 v2(101.175,42.75) ; U10.A8@101.225,45.046 101.225,45.059 102.016,45.85 v2(102.025,45.85) 102.526,45.349 C95.1@102.649,45.349
  Top Layer w0.381: U8.E5@84.035,47.824 84.039,47.828 84.039,48.294 84.1,48.354 v2(84.1,48.375) 84.115,48.36 84.537,48.36 U8.F5@84.564,48.334 ; U8.G5@85.175,48.922 85.171,48.927 85.171,49.4 85.225,49.454 v2(85.225,49.475) 85.24,49.46 85.687,49.46 U8.H5@85.698,49.45 ; U8.J5@86.289,50.059 U8.K5@86.854,50.624 ; U8.K5@86.925,50.65 86.935,50.64 87.41,50.64 v2(87.425,50.625) 87.419,50.631 U8.L5@87.419,51.256
  MidLayer3PWR w0.203: v2(84.1,48.375) v2@85.175,49.45 ; v2(85.225,49.475) 85.237,49.487 85.758,49.487 86.325,50.053 86.325,50.525 86.3,50.55 ; 86.35,50.675 86.4,50.625 v2(87.425,50.625)
  Bottom Layer w0.279: v2(84.1,48.375) 84.134,48.375 84.452,48.693 C37.1@84.474,48.691 C37.1@84.474,48.691 ; C36.1@85.184,50.099 85.169,50.084 85.169,50.063 85.225,50.008 v2(85.225,49.475)
  Bottom Layer w0.283: C38.1@87.101,50.277 87.425,50.601 v2(87.425,50.625)
  Bottom Layer w0.305: C96.1@89.23,40.9 89.271,40.941 89.271,41.53 89.291,41.55 v2@89.325,41.55 ; v2@96.075,47.325 96.139,47.325 96.614,47.8 C98.1@96.614,47.811 ; v2(96.1,39.375) C94.1@96.475,39.375 ; C98.1@96.75,47.975 96.784,47.975 97.184,48.375 v2(97.225,48.375) ; v2@97.225,49.5 97.252,49.527 97.252,50.097 C99.1@97.28,50.125 ; v2@97.287,48.392 97.275,48.379 97.275,48.325 v2(98.375,47.225) 98.375,47.184 98.898,46.661 C102.1@98.898,46.598 ; v2(99.95,41.875) 99.991,41.875 100.451,41.415 100.61,41.415 C101.1@100.625,41.4
  Bottom Layer w0.406: v2(79.3,46.5) 79.3,46.514 79.873,47.087 C39.1@79.873,47.098
  other v1: 58.275,43.05 58.275,43.95 57.575,44.875 58.25,44.875
  other v2: 96.3,34.9 97.925,35.3 95.425,35.775 89.3,41.6 89.9,42.225 93.85,45 96.1,47.275 97.225,49.475
WIFI_ANT: R118.2 U24.2 | length 1.4
  Top Layer w0.167: U24.2@92.87,77.374 92.87,78.695 R118.2@92.9,78.725
WIFI_ANT_MATCH: C159.1 R117.2 R118.1 | length 2
  Top Layer w0.167: C159.1@92.85,80.675 92.875,80.65 R118.1@92.875,79.75 ; C159.1@92.855,80.75 92.855,81.78 R117.2@92.9,81.825
WIFI_ANT_MATCH_OUT: ANT1.1 C158.1 R117.1 | length 4
  Top Layer w0.167: C158.1@92.775,83.675 92.875,83.775 ANT1.1@92.875,86.725 ; R117.1@92.85,82.78 C158.1@92.85,83.7
WIFI_HOST_WAKE: U8.T11 U24.13 | length 26.2
  Top Layer w0.138: v1(81.625,75.25) 83.545,75.25 U24.13@83.582,75.286 ; U8.T11@86.854,57.412 87.444,57.412 87.827,57.03 88.155,57.03 v2@88.475,57.35
  MidLayer2SIG w0.2: v1(81.625,75.25) 81.625,71.725 83.475,69.875 83.475,60.85 84.2,60.125 84.525,60.125 84.7,59.95 85.931,59.95 86.111,60.131 86.82,60.131 88.575,58.375 v2@88.575,57.45
  other v2: 88.554,57.417
WIFI_LPO: C156.2 U24.24 Y6.3 | length 7
  Top Layer w0.169: U24.24@85.693,65.483 85.693,65.132 v2(85.7,65.125)
  Bottom Layer w0.169: v2@85.8,65.15 85.825,65.125 87.8,65.125 89.545,66.87 89.545,67.593 Y6.3@89.577,67.625
  Bottom Layer w0.305: Y6.3@89.775,67.4 89.82,67.445 C156.2@91.1,67.445
WIFI_REG_ON: U8.U12 U24.12 | length 24.5
  Top Layer w0.169: v1(82.5,76.7) 82.5,76.286 82.599,76.186 U24.12@83.582,76.186 ; U8.U12@86.854,58.544 86.913,58.544 87.094,58.725 87.241,58.725 87.255,58.711 87.585,58.711 87.599,58.725 v1@88.15,59.275
  MidLayer2SIG w0.2: v1(82.5,76.7) 82.5,71.8 83.844,70.456 83.844,61.048 84.417,60.475 84.75,60.475 84.881,60.344 85.836,60.344 85.911,60.42 87.205,60.42 v1(88.25,59.375)
WIFI_VIN_LDO: C157.1 L8.1 U24.23 | length 2
  Top Layer w0.169: U24.23@84.717,65.633 U24.23@84.793,65.633
  Top Layer w0.305: v2@84.464,65.38 U24.23@84.717,65.633
  Bottom Layer w0.169: L8.1@84.3,66.1 L8.1@84.325,66.125
  Bottom Layer w0.305: v2(84.3,65.325) L8.1@84.3,66.1 ; v2@84.45,65.3 84.617,65.133 84.617,64.813 C157.1@84.755,64.675
WIFI_VIN_LDO_OUT: L8.2 U24.21 | length 1.4
  Top Layer w0.305: v2@82.707,68.082 U24.21@83.108,68.082
  Bottom Layer w0.305: v2(82.7,68.075) 83.675,68.075 L8.2@83.7,68.1
WIFI_XTAL_IN: C151.2 U24.10 Y5.3 | length 8.9
  Top Layer w0.169: U24.10@85.67,77.374 v1@85.67,78.625
  Bottom Layer w0.169: C151.2@80.825,76.675 80.825,76.149 80.924,76.05 83.725,76.05 85.664,77.989 85.664,78.564 v1@85.7,78.6 ; C151.2@80.825,76.925 Y5.3@80.825,77.725
  other v1: 85.664,78.624
WIFI_XTAL_OUT: C150.2 U24.11 Y5.1 | length 6.8
  Top Layer w0.169: v1@84.725,78.625 84.725,77.6 U24.11@84.75,77.575
  Bottom Layer w0.169: Y5.1@81.955,80.495 C150.2@81.955,81.55 ; C150.2@81.975,81.725 82.75,81.725 84.689,79.786 v1(84.689,78.574)
pads on no net: ANT1.2 D2.6 J2. J2.7 J5.C6 J5.SW J8.06 SW1.5 SW2.5 U1.1 U1.2 U1.6 U1.9 U1.10 U1.11 U1.12 U1.13 U1.14 U1.15 U1.16 U1.17 U1.18 U1.19 U1.20 U1.21 U1.22 U1.23 U1.24 U1.27 U1.28 U2. U2.A8 U2.B8 U4.4 U4.5 U4.6 U4.11 U4.14 U4.15 U4.16 U4.17 U4.33 U4.34 U4.35 U4.36 U4.37 U4.38 U4.44 U5.5 U8.A3 U8.A7 U8.A8 U8.A9 U8.A14 U8.B6 U8.B7 U8.B8 U8.B9 U8.B12 U8.C7 U8.C8 U8.C9 U8.C13 U8.D3 U8.D13 U8.E17 U8.F16 U8.M5 U8.M15 U8.P16 U8.P17 U8.P18 U8.R5 U8.R6 U8.R7 U8.R13 U8.T6 U8.T7 U8.T10 U8.T14 U8.T15 U8.T16 U8.U5 U8.U6 U8.U10 U8.U14 U8.U15 U8.U16 U8.U18 U8.V5 U8.V6 U8.V14 U8.V15 U8.V16 U8.V17 U8.V18 U9.1 U10.B3 U10.E1 U10.G8 U10.J1 U10.J2 U10.J8 U10.J9 U10.L1 U10.L9 U10.M1 U10.M7 U10.M9 U10.P1 U10.P9 U10.T1 U11.A7 U11.A9 U11.A10 U11.A11 U11.A12 U11.A13 U11.A14 U11.B1 U11.B9 U11.B10 U11.B11 U11.B12 U11.B13 U11.B14 U11.C7 U11.C8 U11.C9 U11.C10 U11.C11 U11.C12 U11.C13 U11.C14 U11.D3 U11.D12 U11.D13 U11.D14 U11.E1 U11.E2 U11.E3 U11.E5 U11.E8 U11.E9 U11.E10 U11.E12 U11.E13 U11.E14 U11.F1 U11.F2 U11.F3 U11.F10 U11.F12 U11.F13 U11.F14 U11.G1 U11.G2 U11.G3 U11.G10 U11.G12 U11.G13 U11.G14 U11.H1 U11.H2 U11.H3 U11.H5 U11.H12 U11.H13 U11.H14 U11.J1 U11.J2 U11.J3 U11.J12 U11.J13 U11.J14 U11.K1 U11.K2 U11.K3 U11.K6 U11.K7 U11.K10 U11.K12 U11.K13 U11.K14 U11.L1 U11.L2 U11.L3 U11.L12 U11.L13 U11.L14 U11.M1 U11.M2 U11.M3 U11.M7 U11.M8 U11.M9 U11.M10 U11.M11 U11.M12 U11.M13 U11.M14 U11.N3 U11.N6 U11.N7 U11.N8 U11.N9 U11.N10 U11.N11 U11.N12 U11.N13 U11.N14 U11.P1 U11.P2 U11.P7 U11.P8 U11.P9 U11.P10 U11.P11 U11.P12 U11.P13 U11.P14 U12.1 U15.SM1 U15.SM2 U15.SM3 U15.SM4 U16.2 U16.5 U16.6 U16.7 U16.8 U16.21 U16.22 U16.23 U16.24 U19.3 U19.4 U19.5 U19.6 U19.7 U19.8 U19.9 U19.10 U19.11 U19.12 U19.13 U19.14 U19.15 U19.16 U19.19 U19.20 U19.21 U19.22 U19.23 U19.25 U19.26 U19.34 U19.35 U19.36 U19.37 U19.38 U19.40 U19.41 U19.42 U19.43 U19.44 U19.47 U19.48 U19.49 U19.50 U19.51 U19.53 U19.67 U19.68 U23.1 U23.2 U23.4 U23.8 U23.14 U23.16 U23.17 U23.18 U23.19 U24.4 U24.5 U24.6 U24.7 U24.8 U24.25 U24.26 U24.27 U24.28 U24.30 U24.32 U24.34 U24.35 U24.37 U24.38 U24.39 U24.40 U24.41 U24.42 U24.43 U24.44 U24.TP1 U24.TP2 U24.TP3 Y6.1

## Polygon pours and split planes (outlines as drawn)
GND on Top Layer "ІІ" (solid, remove dead copper, pour order 138): 84.425,67.85 85.45,66.825 93.075,66.825 93.125,66.875 94.125,67.875 94.125,75.55 93.125,76.55 93.075,76.5 85.441,76.5 84.425,75.484
GND on Top Layer "NONET_L-01_P-001" (solid, pour order 142): 122.9,40.7 122.899,40.701 121.451,40.701 120.85,40.1 120.85,25.675 121.5,25.025 129.45,25.025 130.25,25.825 130.25,40.05 129.625,40.675 129.525,40.675 121.575,40.7
GND on Top Layer "GUARD_RING_GND_TOP" (solid, pour order 155): 25.127,93.993 25.127,91.825 153.127,91.825 153.127,93.993
GND on Top Layer "NONET_L-01_P-001" (solid, pour order 123): 91.725,77.725 91.725,77.975 91.325,78.375 87.2,78.375 87.2,79.05 87.7,79.55 87.7,80.675 86.475,81.9 81.35,81.9 80.65,82.6 80.65,94 104.575,94 104.575,82.125 103.75,81.3 97.6,81.3 94.025,77.725
GND on Top Layer "GUARD_RING_GND_TOP" (solid, pour order 154): 25.127,24.146 25.127,22 153.127,22 153.127,24.146
3V3 on Top Layer "NONET_L-01_P-001" (solid, pour order 150): 83.025,67.25 83.2,67.075 83.2,66.125 83.05,65.975 81.325,65.975 81.175,66.125 81.175,67 81.425,67.25
GND on Top Layer "GND_L01_P005" (solid, pour order 5): 46.815,29.19 46.675,29.05 46.675,28.05 46.875,27.85 50.975,27.85 51.475,28.35 51.475,37.05 50.85,37.675 47.575,37.675 46.975,37.075 46.975,31.15 47.575,30.55 47.575,29.407
GND on Top Layer "NONET_L-01_P-001" (solid, pour order 149): 137.35,57.075 137.525,56.9 137.525,56.275 137.375,56.125 136.15,56.125 136,56.275 136,56.9 136.175,57.075
GND on Top Layer "NONET_L-01_P-001" (solid, pour order 139): 58.675,34.45 60.85,34.45 60.925,34.525 61.075,34.675 61.075,35.675 60.375,36.375 60.375,37.95 60.05,38.275 58.175,38.275 57.9,38 57.9,34.45
3V3 on Top Layer "NONET_L-01_P-001" (solid, pour order 148): 63.2,54.95 64.4,54.95 65.075,54.275 65.675,54.275 65.925,54.025 65.925,53.081 65.594,52.75 63.8,52.75 62.9,53.65 62.9,54.65
GND on Top Layer "UNDER_MODULE_LTE" (solid, pour order 114): 108.5,85.75 108.5,68.65 110.7,66.45 127.725,66.45 129.975,68.7 129.975,85.8 127.825,87.95 110.7,87.95
GND on Top Layer "NONET_L-01_P-001" (solid, pour order 141): 67.525,41.2 67.675,41.05 67.675,40.6 67.5,40.425 65.225,40.425 65.1,40.55 65.1,41.025 65.275,41.2 67,41.2
GND on Top Layer "NONET_L-01_P-001" (solid, pour order 140): 55.625,43.7 54.65,43.7 54.4,43.95 54.4,46.05 54.825,46.475 55.725,46.475 55.725,45.425 56.525,44.625 56.525,43.725 55.65,43.725
GND on Top Layer "NONET_L-01_P-001" (solid, pour order 135): 140.575,62 140.4,62.175 140.4,62.8 140.55,62.95 141.775,62.95 141.925,62.8 141.925,62.175 141.75,62
GND on Top Layer "NONET_L-01_P-001" (solid, pour order 134): 56.725,56.05 55.5,56.05 54.725,55.275 54.725,54.1 55.025,53.8 55.125,53.8 56.925,53.8 56.925,55.85
GND on Top Layer "NONET_L-01_P-001" (solid, pour order 133): 69.25,49.925 69.725,49.925 69.85,49.8 69.85,49.475 70.025,49.3 70.425,49.3 70.675,49.55 70.675,50.6 70.45,50.825 70.4,50.825 69.25,50.825
VDD_1V1_MPU on Top Layer "Top Layer-VDD_1V1_MPU" (solid, pour order 39): 62.575,46.2 63.425,45.35 63.9,45.35 64.25,45 64.25,42.475 66.9,42.475 66.9,45.775 66.4,46.275 64.25,46.275 63.2,46.275 62.775,46.7 62.575,46.7
GND on Top Layer "NONET_L-01_P-001" (solid, pour order 128): 53.8,51.675 52.875,51.675 52.6,51.95 51.925,51.95 51.65,51.675 51.65,50.575 51.775,50.45 51.8,50.475 53.15,50.475 53.4,50.725 53.8,50.725
GND on Top Layer "NONET_L-01_P-001" (solid, pour order 122): 147.175,37.125 148.825,35.475 153.125,35.475 153.125,41.875 148.85,41.875 147.1,40.125 131.8,40.125 131.8,37.125 131.9,37.125
GND on Top Layer "NONET_L-01_P-001" (solid, pour order 121): 147.775,74.925 148.675,74.025 153,74.025 153,80.4 148.75,80.4 147.85,79.5 130.975,79.5 130.975,74.925
3V3 on Top Layer "NONET_L-01_P-001" (solid, pour order 117): 115.975,26.425 115.775,26.225 114,26.225 113.725,26.5 113.725,28.1 113.95,28.325 119.575,28.325 119.575,26.425
3V7 on Top Layer "NONET_L-01_P-001" (solid, pour order 111): 140.025,61.15 140.025,73.15 138.65,74.525 130.2,74.525 130,74.325 130,72.075 130.275,71.8 137.05,71.8 137.75,71.1 137.75,65.575 135.4,63.225 135.4,61.575 135.825,61.15 137.6,61.15
3V3 on Top Layer "3V3_WIFI" (solid, pour order 115): 85.637,79.538 85.45,79.725 85.45,81.05 85.625,81.225 86.85,81.225 87.05,81.025 87.05,79.538 85.937,79.538
GND on Top Layer "NONET_L-01_P-001" (solid, pour order 112): 130.225,70.9 131.05,70.9 134,67.95 137.075,67.95 137.4,68.275 137.4,70.525 136.525,71.4 131.75,71.4 131.65,71.5 130.225,71.5
GND on Top Layer "GND_L01_P104" (solid, pour order 104): 60.825,56.925 60.8,56.925 60.45,56.925 60.275,57.1 60.275,57.6 60.475,57.8 62.325,57.8 62.475,57.65 62.475,57.075 62.325,56.925 60.8,56.925
3V7_DC_SW on Top Layer "3V7_DC_SW_L01_P065" (solid, pour order 65): 127.95,61.575 127.65,61.875 127.65,62.675 127.85,62.875 128.65,62.875 128.85,62.675 128.85,61.875 128.55,61.575
GND on Top Layer "GND_L01_P066" (solid, pour order 66): 129.475,61.525 130.15,62.2 130.15,63.325 129.3,64.175 128.575,64.175 128.575,63.225 128.975,62.825 128.975,61.525
5V_SYS on Top Layer "5V_SYS_L01_P067" (solid, pour order 67): 127.775,63.225 127.5,62.95 127.5,61.575 127,61.575 126.175,62.4 126.175,63.45 126.9,64.175 127.775,64.175
3V7_DC_SW on Top Layer "3V7_DC_SW_L01_P068" (solid, pour order 68): 131.65,62.9 131.65,61.6 130.45,61.6 130.275,61.775 130.275,62.725 130.45,62.9
INPUT_DC_SW on Top Layer "INPUT_DC_SW_L01_P008" (solid, pour order 8): 53.1,27.8 54.7,27.8 54.7,26.3 53.1,26.3 52.9,26.5 52.9,27.6
VCCIN on Top Layer "VCCIN_L01_P001" (solid, pour order 1): 45.3,28 45.475,28.175 45.475,30.5 46.275,31.3 46.275,37.3 45.9,37.675 38.41,37.675 37.875,37.293 37.875,29.418 39.608,28
INPUT_DC_SW on Top Layer "INPUT_DC_SW_L01_P004" (solid, pour order 4): 46.375,28.1 45.875,28.1 45.675,28.3 45.675,30.425 46.05,30.8 47.05,30.8 47.375,30.475 47.375,29.7 47.175,29.5 46.675,29.5 46.575,29.4 46.575,28.3
5VIN on Top Layer "5VIN_L01_P009" (solid, pour order 9): 57.425,33.975 57.425,39.975 54.075,43.325 54.075,47.45 54.475,47.85 55.25,47.85 55.25,48.75 52.85,48.75 52.1,48 52.1,42.125 54.975,39.25 54.975,33.975
GND on Top Layer "GND_L01_P049" (solid, pour order 49): 47.3,66.15 46.55,65.4 46.55,64.2 47.3,63.45 48.2,63.45 48.2,64.35 47.8,64.75 47.8,66.15
3V3 on Top Layer "3V3_L01_P064" (solid, pour order 64): 55.9,69.9 55.9,72 55.6,72.3 51.9,72.3 51.6,72 51.6,71.6 51.4,71.4 50.4,71.4 50.4,70.5 53.3,70.5 53.9,69.9
3V3_DC_SW on Top Layer "3V3_DC_SW_L01_P059" (solid, pour order 59): 53.9,65.9 53.9,64.6 52.7,64.6 52.525,64.775 52.525,65.725 52.7,65.9
5V_SYS on Top Layer "5V_SYS_L01_P050" (solid, pour order 50): 48.925,64.375 49.275,64.725 49.275,66.1 49.775,66.1 50.575,65.3 50.575,64.2 49.8,63.425 48.925,63.425
3V3_DC_SW on Top Layer "3V3_DC_SW_L01_P048" (solid, pour order 48): 48.825,66 49.125,65.7 49.125,64.9 48.925,64.7 48.125,64.7 47.925,64.9 47.925,65.7 48.225,66
VDD_1V5_DDR3L on Top Layer "Top Layer-VDD_1V5_DDR3L" (solid, pour order 41): 57.525,42.525 58.7,42.525 59.85,42.525 59.85,44.9 60.75,45.8 60.75,45.965 60.67,46.045 60.575,46.075 60.125,45.625 57.45,45.625 57.175,45.35 57.175,42.875
VDD_1V1_CORE on Top Layer "VDD_1V1_CORE_L01_P037" (solid, pour order 37): 67.05,48.225 69.525,48.225 69.7,48.4 69.7,49.2 69.525,49.375 67,49.375 67,48.25 67,48.225
VDD_1V1_CORE on Top Layer "VDD_1V1_CORE_L01_P036" (solid, pour order 36): 63.8,49.3 63.825,49.325 63.875,49.375 65.625,49.375 65.7,49.3 65.7,48.3 65.625,48.225 65.175,48.225 64.9,48.5 64.9,48.775 64.575,49.1 63.875,49.1 63.8,49.175
5V_SYS on Top Layer "5V_SYS_L01_P030" (solid, pour order 30): 57.52,49.15 57.075,49.15 56.95,49.275 55.7,49.275 55.55,49.425 55.55,50.35 55.7,50.5 56.675,50.5 56.825,50.35 56.825,49.875 56.975,49.725 57.52,49.725
VBUS_IN on Top Layer "VBUS_IN_L01_P018" (solid, remove dead copper, pour order 18): 56.875,46.625 56.875,47.225 57.075,47.425 57.35,47.425 57.475,47.55 57.475,47.725 57.375,47.825 56.175,47.825 55.975,47.625 55.975,46.625 56.175,46.425 56.675,46.425 56.175,46.425 56.675,46.425
3V3 on MidLayer3PWR "3V3_PWR_PLANE" (solid, remove dead copper, pour order 145): 28.65,24.381 151.8,24.381 151.8,91.825 28.65,91.825
5V_SYS on MidLayer3PWR "Mid Layer 3-5V_SYS" (solid, pour order 103): 43.425,52.45 46.975,48.9 56.575,48.9 56.775,49.1 56.775,50.325 56.6,50.5 50.325,50.5 46.725,54.1 46.725,59 48.35,60.625 57.75,60.625 65.675,68.55 86.875,68.55 90.825,64.6 112.025,64.6 114.875,61.75 127.2,61.75 127.5,62.05 127.5,63.3 127.225,63.575 119.675,63.575 115.125,68.125 92.325,68.125 88.6,71.85 64.3,71.85 56.2,63.75 51.475,63.75 50.625,64.6 50.625,65.375 50.4,65.6 49.475,65.6 49.2,65.325 49.2,64.55 49.025,64.375 47.375,64.375 43.425,60.425
VDD_1V5_DDR3L on MidLayer3PWR "VDD_1V5_DDR3L_L04_P079" (solid, pour order 79): 96.575,31.725 88.175,31.725 81.525,38.375 72.7,38.375 57.9,38.375 55.875,40.4 55.875,44.75 57.125,46 60.075,46 62.725,43.35 73.475,43.35 77.025,46.9 82.225,46.9 91.55,56.225 96.575,56.225 102.7,50.1 102.7,37.85
VDD_1V1_CORE on MidLayer3PWR "Mid Layer 3-VDD_1V1_CORE" (solid, pour order 107): 78.75,54.8 81.55,54.8 81.975,54.8 82.5,54.275 82.5,53.5 81.95,52.95 81.95,52.325 82.25,52.025 82.25,50.6 83.725,49.125 84.3,49.125 87.65,52.475 87.65,53.4 83.625,57.425 75.925,57.425 67.875,49.375 67.875,48.375 68.2,48.05 72,48.05
LDO_1V8_RTC on MidLayer3PWR "LDO_1V8_RTC_L04_P096" (solid, pour order 96): 56.225,51.45 55.95,51.175 55.95,50.525 56.425,50.05 60.025,50.05 65.05,45.025 74.6,45.025 77.675,48.1 82.497,48.1 82.498,48.098 82.5,48.1 83.325,48.1 83.575,48.35 83.575,49.175 82.625,50.125 82.625,50.4 82.7,50.475 82.925,50.475 83,50.55 83,50.8 82.675,51.125 78,51.125 73.9,47.025 67.3,47.025 62.875,51.45
VDD_1V1_MPU on MidLayer3PWR "Mid Layer 3-VDD_1V1_MPU" (solid, pour order 109): 80.975,51.575 81.225,51.325 81.8,51.325 82.1,51.625 82.1,52.075 81.475,52.7 81.475,53.05 82.175,53.75 82.175,54.325 82.025,54.475 78.975,54.475 74.55,50.05 74.55,49.225 75.025,48.75 75.375,48.75 78.2,51.575
LDO_1V8 on MidLayer3PWR "Mid Layer 3-LDO_1V8" (solid, pour order 90): 82.875,58.25 83.225,58.25 84,59.025 85.85,59.025 86.5,58.375 86.5,57.5 86,57 86,56.15 86.125,56.025 86.5,56.025 86.725,56.25 86.725,56.725 87.325,57.325 87.325,58.6 85.85,60.075 84.8,60.075 83.95,60.925 66.425,60.925 60.8,55.3 60.8,53.975 61.025,53.75 61.475,53.75 65.975,58.25 82.65,58.25
LDO_3V3 on MidLayer3PWR "Mid Layer 3-LDO_3V3" (solid, pour order 92): 59.525,53.7 60.25,53.7 60.625,54.075 60.625,55.725 66.3,61.4 85,61.4 87.4,59 87.4,56.725 86.575,55.9 86.2,55.9 85.175,56.925 85.175,58.3 84.525,58.95 84,58.95 82.95,57.9 82.95,57.5 83.438,57.012 84.088,57.012 84.325,56.775 88.5,52.6 88.725,52.6 89.025,52.9 89.025,54.075 89.975,55.025 89.975,59.875 85.45,64.4 66.025,64.4 59.2,57.575 59.2,54.025
3V7_DC_SW on MidLayer3PWR "Mid Layer 3-3V7_DC_SW" (solid, pour order 74): 131.225,61.275 131.575,61.625 131.575,62.675 131.375,62.875 130.575,62.875 130.375,62.675 130.375,62.05 130.2,61.875 129.05,61.875 128.85,62.075 128.85,62.675 128.65,62.875 127.85,62.875 127.65,62.675 127.65,61.575 127.95,61.275
INPUT_DC_SW on MidLayer3PWR "INPUT_DC_SW_L04_P007" (solid, pour order 7): 45.675,30.5 45.875,30.7 47.175,30.7 47.375,30.5 47.375,29.7 47.375,29.5 47.375,28.1 47.675,27.8 54.475,27.8 54.575,27.7 54.575,26.4 54.475,26.3 46.075,26.3 45.675,26.7
3V3_DC_SW on MidLayer3PWR "Mid Layer 3-3V3_DC_SW" (solid, pour order 58): 50.7,65.7 51.4,65 52.2,65 52.7,64.5 53.5,64.5 53.8,64.8 53.8,65.9 53.4,66.3 48.5,66.3 48.2,66 47.9,65.7 47.9,64.9 48.1,64.7 48.9,64.7 49.1,64.9 49.1,65.4 49.4,65.7